# EAGLE board routev11.1 (EAGLE 8.6.0)
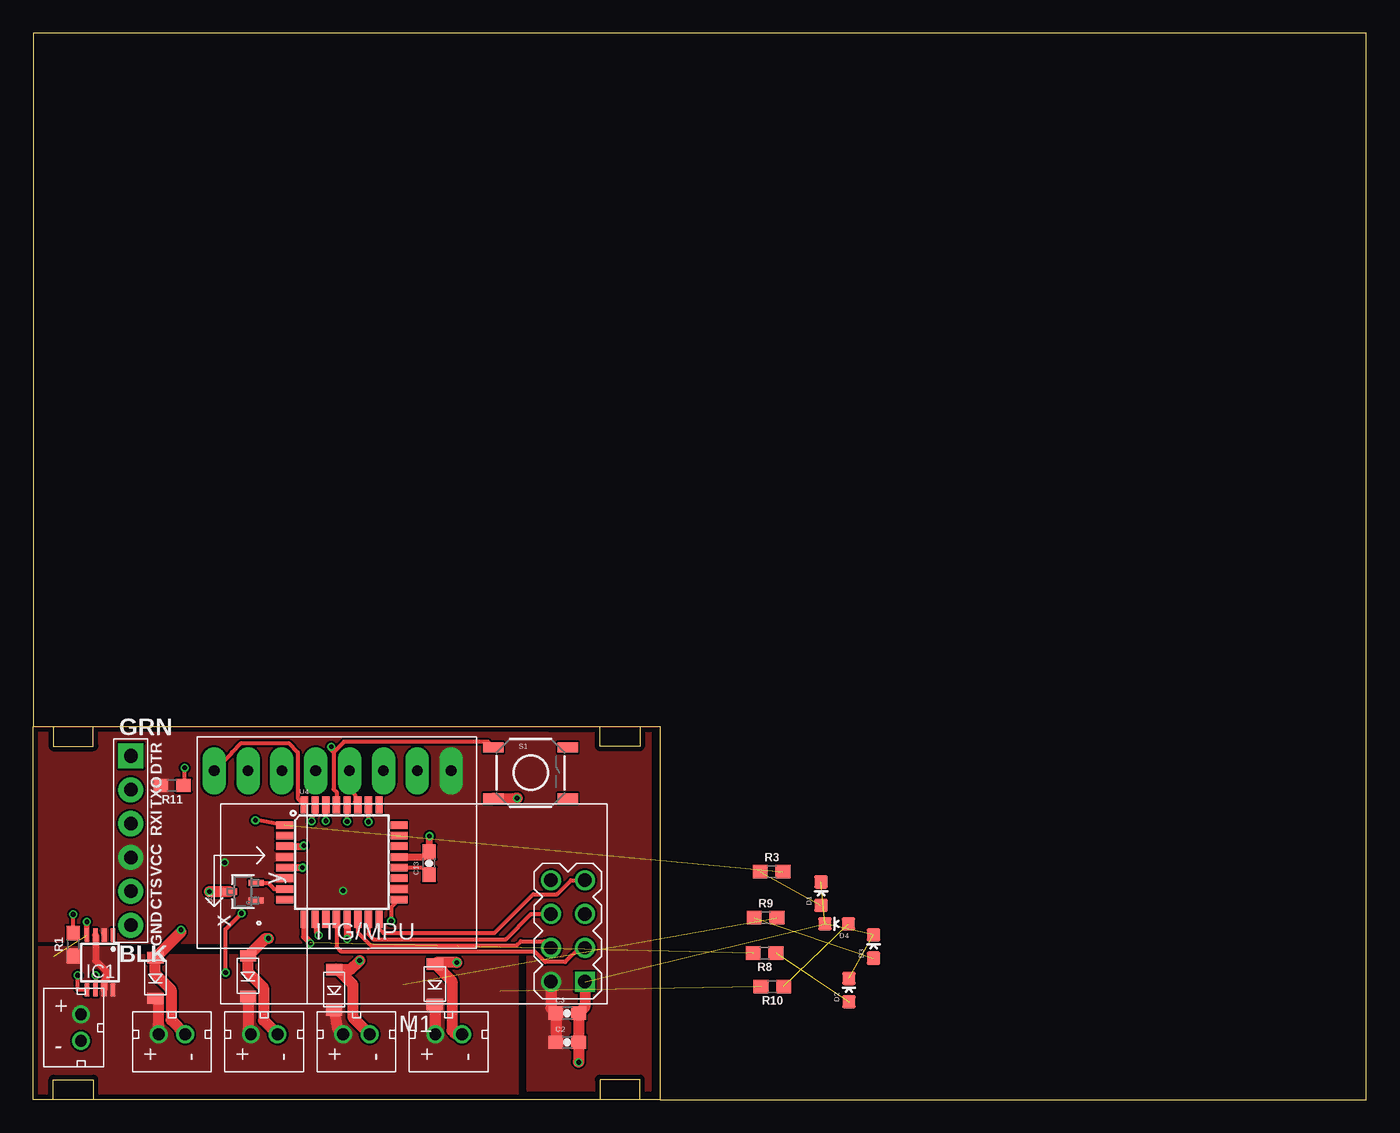
[diagram p0: board, top side]
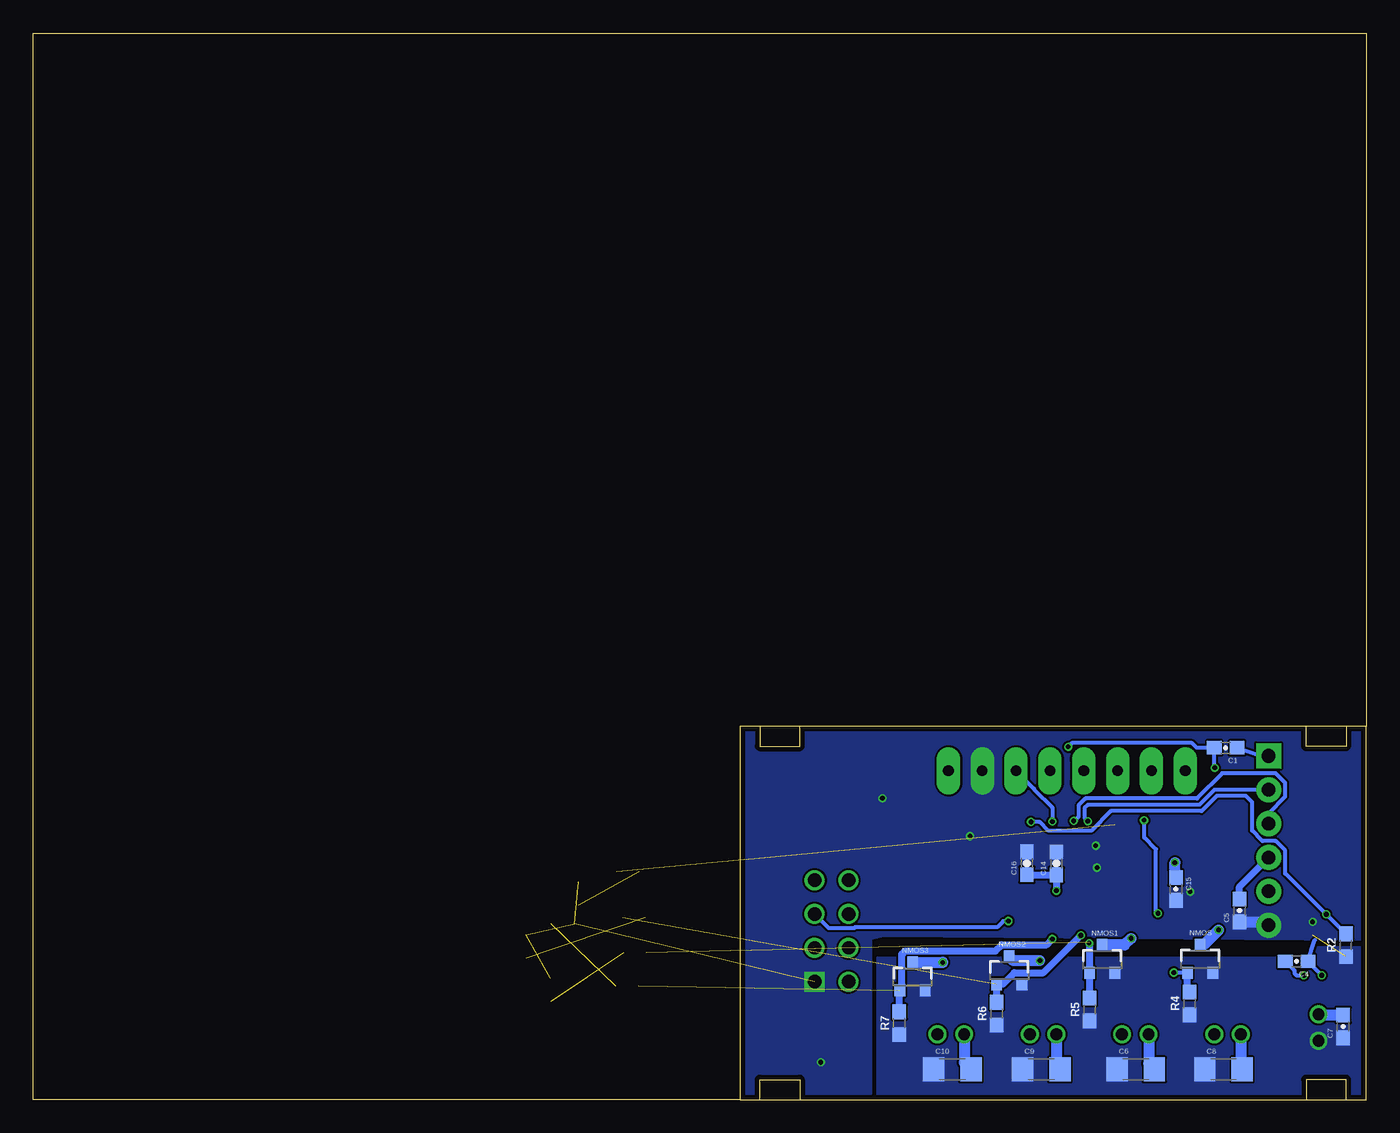
[diagram p1: board, bottom side, seen from below]

Size 100 x 80 mm. Coordinates in mm from the lower left corner, seen from the top.
Outline: 47,0 100,0 100,80 0,80 0,28
Outline: 0,28 0,0 1.5,0
Outline: 0,28 1.5,28
Outline: 1.5,28 4.5,28
Outline: 4.5,28 42.5,28
Outline: 42.5,28 45.5,28
Outline: 45.5,28 47,28 47,0
Outline: 47,0 45.5,0
Outline: 45.5,0 42.5,0
Outline: 42.5,0 4.5,0
Outline: 4.5,0 1.5,0
Outline: 1.5,0 1.5,1.5 4.5,1.5 4.5,0
Outline: 1.5,28 1.5,26.5 4.5,26.5 4.5,28
Outline: 45.5,28 45.5,26.5 42.5,26.5 42.5,28
Outline: 45.5,0 45.5,1.5 42.5,1.5 42.5,0
Copper layers (1*16): Top 0.035559375mm / dielectric 1.6mm / Bottom 0.035559375mm
Design rules "oshpark-2layer": minimum track width 6mil, minimum drill 10mil, track to track 6mil, track to pad 6mil, pad to pad 6mil, via to via 6mil, smd to smd 6mil, copper to edge 15mil, drill to drill 6mil, minimum pad ring 5mil, minimum via ring 5mil, stop-mask expansion 2.5mil, vias tented up to drill 0mil, thermal gap 10mil

## Footprints (pad centres in the part's own frame; a part is rotated, then mirrored left to right if it is on the bottom)
0603-CAP = smd 1.1 x 1: 1 -0.85,0; 2 0.85,0
1206 = smd 1.6 x 1.8: 1 -1.4,0; 2 1.4,0
LED-0603 = smd 1 x 1: A 0,-0.877; C 0,0.877
MINI2-F3-B = smd 1.22 x 0.85: NEG 0,1.55; POS 0,-1.5
MSOP8 = smd 0.35 x 1: 1 -0.975,-2.05; 2 -0.325,-2.05; 3 0.325,-2.05; 4 0.975,-2.05; 5 0.975,2.05; 6 0.325,2.05; 7 -0.325,2.05; 8 -0.975,2.05
FTDI_DEVICE_SIDE = drill 1.016 pad 1.88 square: P$1 -6.35,0 | drill 1.016 pad 1.88: P$2 -3.81,0; P$3 -1.27,0; P$4 1.27,0; P$5 3.81,0; P$6 6.35,0
WIRELESS-NRF24L01 = drill 1 square: 1 -12.7,6.35 | drill 1: 2 -10.16,6.35; 3 -12.7,3.81; 4 -10.16,3.81; 5 -12.7,1.27; 6 -10.16,1.27; 7 -12.7,-1.27; 8 -10.16,-1.27
JST_CONNECTOR_FEMALE = drill 0.889: + 0,1; - 0,-1
SOT23-3 = smd 0.8 x 0.9: 1 -0.95,-1; 2 0.95,-1; 3 0,1.1
0603 = smd 1.1 x 1: 1 -0.85,0; 2 0.85,0
TACTILE-SWITCH-SMD = smd 1.524 x 0.762: 1 -2.794,1.905; 2 2.794,1.905; 3 -2.794,-1.905; 4 2.794,-1.905
GY-521 = drill 0.8 pad 1.778 long: ADO -8.89,-6.35; GND -8.89,6.35; INT -8.89,-8.89; SCL -8.89,3.81; SDA -8.89,1.27; VCC -8.89,8.89; XCL -8.89,-3.81; XDA -8.89,-1.27
21-0075D = smd 0.457 x 1.118: 1 -0.65,-0.991; 2 0.65,-0.991; 3 0,0.991
TQFP32-08 = smd 1.27 x 0.559: 1 -4.293,2.8; 2 -4.293,2; 3 -4.293,1.2; 4 -4.293,0.4; 5 -4.293,-0.4; 6 -4.293,-1.2; 7 -4.293,-2; 8 -4.293,-2.8; 17 4.293,-2.8; 18 4.293,-2; 19 4.293,-1.2; 20 4.293,-0.4; 21 4.293,0.4; 22 4.293,1.2; 23 4.293,2; 24 4.293,2.8 | smd 0.559 x 1.27: 9 -2.8,-4.293; 10 -2,-4.293; 11 -1.2,-4.293; 12 -0.4,-4.293; 13 0.4,-4.293; 14 1.2,-4.293; 15 2,-4.293; 16 2.8,-4.293; 25 2.8,4.293; 26 2,4.293; 27 1.2,4.293; 28 0.4,4.293; 29 -0.4,4.293; 30 -1.2,4.293; 31 -2,4.293; 32 -2.8,4.293

## Placement (x,y rotation side)
C1  100nF  [0603-CAP]  10.54,26.39 180 bottom
C2  10uF  [0603-CAP]  40.06,4.29 0 top
C3  100nF  [0603-CAP]  40.06,6.48 0 top
C4  1uF  [0603-CAP]  5.22,10.37 180 bottom
C5  10uF  [0603-CAP]  9.5,14.18 90 bottom
C6  100uF  [1206]  17.29,2.26 0 bottom
C7  10uF  [0603-CAP]  1.73,5.49 90 bottom
C8  100uF  [1206]  10.71,2.26 0 bottom
C9  100uF  [1206]  24.37,2.26 0 bottom
C10  100uF  [1206]  31.05,2.26 0 bottom
C13  100nF  [0603-CAP]  29.69,17.73 90 top
C14  100nF  [0603-CAP]  23.24,17.7 90 bottom
C15  100nF  [0603-CAP]  14.27,15.8 270 bottom
C16  100nF  [0603-CAP]  25.45,17.73 90 bottom
D1  BLUE  [LED-0603]  59.11,15.44 0 top
D2  BLUE  [LED-0603]  61.19,8.2 0 top
D3  BLUE  [LED-0603]  63.04,11.48 0 top
D4  BLUE  [LED-0603]  60.27,13.18 90 top
DIODE  DB2W40300L  [MINI2-F3-B]  9.16,9.14 180 top
DIODE1  DB2W40300L  [MINI2-F3-B]  16.11,9.29 180 top
DIODE2  DB2W40300L  [MINI2-F3-B]  22.57,8.25 180 top
DIODE3  DB2W40300L  [MINI2-F3-B]  30.13,8.66 180 top
IC1  MCP1253-ADJ  [MSOP8]  4.99,10.29 180 top
J1  FTDI_DEVICE  [FTDI_DEVICE_SIDE]  7.32,19.43 270 top
M1  WIRELESS-NRF24L01  [WIRELESS-NRF24L01]  28.68,15.19 180 top
MOTOR1  JST_CONNECTOR_FEMALE  [JST_CONNECTOR_FEMALE]  10.4,4.9 90 top
MOTOR2  JST_CONNECTOR_FEMALE  [JST_CONNECTOR_FEMALE]  17.32,4.9 90 top
MOTOR3  JST_CONNECTOR_FEMALE  [JST_CONNECTOR_FEMALE]  24.24,4.9 90 top
MOTOR4  JST_CONNECTOR_FEMALE  [JST_CONNECTOR_FEMALE]  31.16,4.9 90 top
NMOS  N-CHANNEL-MOSFET-IRLML6244TRPBF  [SOT23-3]  12.46,10.52 0 bottom
NMOS1  N-CHANNEL-MOSFET-IRLML6244TRPBF  [SOT23-3]  19.81,10.49 0 bottom
NMOS2  N-CHANNEL-MOSFET-IRLML6244TRPBF  [SOT23-3]  26.78,9.66 0 bottom
NMOS3  N-CHANNEL-MOSFET-IRLML6244TRPBF  [SOT23-3]  34.03,9.2 0 bottom
R1  2.2k  [0603]  3,11.63 90 top
R2  2.2k  [0603]  1.52,11.58 90 bottom
R3  2.2k  [0603]  55.4,17.09 0 top
R4  10k  [0603]  13.25,7.2 90 bottom
R5  10k  [0603]  20.75,6.75 90 bottom
R6  10k  [0603]  27.72,6.45 90 bottom
R7  10k  [0603]  35.03,5.74 90 bottom
R8  2.2k  [0603]  54.86,11 180 top
R9  2.2k  [0603]  54.94,13.64 0 top
R10  2.2k  [0603]  55.45,8.48 180 top
R11  10k  [0603]  10.41,23.57 180 top
S1  SWITCH-MOMENTARY-2SMD  [TACTILE-SWITCH-SMD]  37.31,24.51 0 top
U2  GY-521MPU6050  [GY-521]  22.45,15.77 270 top
U3  MAX7375AXR805-T  [21-0075D]  15.72,15.6 90 top
U4  ATMEGA328P_TQFP  [TQFP32-08]  23.14,17.8 0 top
U$1  JST_CONNECTOR_FEMALE  [JST_CONNECTOR_FEMALE]  3.58,5.4 0 top

## Library data of the parts
C1 C4 C5 C7 C15 = SparkFun-Capacitors; PROD_ID: CAP-00810
C2 C3 C6 C8-C10 C13 C14 C16 = SparkFun-Passives
D1 = LEDs; PROD_ID: DIO-08575; SPICEPREFIX: D
D2-D4 = LEDs; PROD_ID: DIO-08575
DIODE DIODE1-DIODE3 J1 M1 MOTOR1-MOTOR4 U2 U$1 = quad
IC1 = microchip
NMOS NMOS1-NMOS3 = quad; DATASHEET: http://www.mouser.com/ds/2/196/irlml6244pbf-936666.pdf; MOUSER: 942-IRLML6244TRPBF; URL: http://www.mouser.com/Search/ProductDetail.aspx?R=IRLML6244TRPBFvirtualkey57370000virtualkey942-IRLML6244TRPBF
R1 R2 R4-R11 = SparkFun-Resistors; PROD_ID: RES-08272
R3 = SparkFun-Resistors; PROD_ID: RES-08272; SPICEPREFIX: R
S1 = quad; PROD_ID: SWCH-08247
U3 = MAX7375AXR805-T; AVAILABILITY: Good; DESCRIPTION: OSCILLATOR MEMS 8MHZ CMOS SMD; MF: Maxim Integrated; MP: MAX7375AXR805+T; PACKAGE: SC-70 Maxim Integrated; PRICE: 1.06 USD
U4 = quad; PROD_ID: IC-09069

## Nets
BATTERY+: C6.2 C7.2 C8.2 C9.2 C10.2 DIODE1.NEG DIODE2.NEG DIODE3.NEG DIODE.NEG IC1.3 IC1.7 IC1.8 MOTOR1.+ MOTOR2.+ MOTOR3.+ MOTOR4.+ R1.1 U$1.+
FTDI-RX: J1.P$3 U4.30
FTDI-TX: J1.P$2 U4.31
GND: C2.2 C3.2 C5.1 C6.1 C7.1 C8.1 C9.1 C10.1 C13.2 C14.2 C15.2 C16.2 D1.C D2.C D3.C D4.C IC1.4 J1.P$6 M1.1 NMOS1.2 NMOS2.2 NMOS3.2 NMOS.2 R2.1 R4.1 R5.1 R6.1 R7.1 S1.3 U2.GND U3.3 U4.3 U4.5 U4.21 U$1.-
IMU-INT: U2.INT U4.32
IMU-SCL: U2.SCL U4.28
IMU-SDA: U2.SDA U4.27
MEASURE_PIN: R1.2 R2.2 U4.26
MOTOR1: NMOS.1 R3.2 R4.2 U4.1
MOTOR2: NMOS1.1 R5.2 R8.2 U4.9
MOTOR3: NMOS2.1 R6.2 R9.2 U4.10
MOTOR4: NMOS3.1 R7.2 R10.2 U4.13
N$1: D4.A R10.1
N$2: C1.1 J1.P$1
N$3: D3.A R9.1
N$4: DIODE1.POS MOTOR2.- NMOS1.3
N$5: DIODE2.POS MOTOR3.- NMOS2.3
N$6: DIODE.POS MOTOR1.- NMOS.3
N$7: DIODE3.POS MOTOR4.- NMOS3.3
N$8: C4.1 IC1.5
N$9: C4.2 IC1.6
N$10: D2.A R8.1
N$11: D1.A R3.1
N$15: C13.1 U4.20
OSC1: U3.2 U4.7
RESET: C1.2 R11.1 S1.1 U4.29
RF-CE: M1.3 U4.12
RF-CSN: M1.4 U4.14
RF-MISO: M1.7 U4.16
RF-MOSI: M1.6 U4.15
RF-SCK: M1.5 U4.17
VCC: C2.1 C3.1 C5.2 C14.1 C15.1 C16.1 IC1.2 J1.P$4 M1.2 R11.2 U2.VCC U3.1 U4.4 U4.6 U4.18

## Tracks (layer width: path | path; a pad name or v marks a point on that pad's centre or on a via)
BATTERY+
  Top 0.508: IC1.3 4.67,10.44 5.46,9.65 5.46,9 5.32,8.86 IC1.7
  Top 0.813: DIODE1.NEG 16.11,5.11 MOTOR2.+ | DIODE2.NEG 22.8,5.34 MOTOR3.+ 23.24,4.67 | DIODE3.NEG 30.13,4.93 MOTOR4.+ | MOTOR1.+ 9.4,5.54 9.36,5.57 9.36,7.39 DIODE.NEG
  Bottom 0.813: MOTOR1.+ 9.4,2.35 C8.2 | MOTOR2.+ 16.32,2.69 C6.2 | MOTOR3.+ 23.24,2.53 C9.2 | MOTOR4.+ 30.16,2.77 C10.2 | C7.2 3.52,6.33 U$1.+
  pour Top (no thermals): 0.18,11.48 6.35,11.46 6.22,10.87 36.32,10.9 36.32,0.13 0.05,0.13
FTDI-RX  (via drill 0.35)
  Top 0.305: v21.95,20.9 U4.30
  Bottom 0.305: J1.P$3 7.32,21.48 6.07,22.73 6.07,23.76 6.8,24.49 10.79,24.49 12.7,22.58 21.07,22.58 21.59,22.06 21.59,21.21 21.95,20.85 v21.95,20.9
FTDI-TX  (via drill 0.35)
  Top 0.305: v20.88,20.88 20.88,21.11 21.16,21.39 21.14,21.4 U4.31
  Bottom 0.305: J1.P$2 11.39,23.24 12.51,22.12 20.88,22.12 21.13,21.87 21.13,21.13 v20.88,20.88
GND  (via drill 0.35)  (5 unrouted)
  Top 0.406: IC1.4 4.02,13.13 4.01,13.18 v4.01,13.34
  Top 0.508: v29.72,19.76 29.72,18.61 C13.2 29.32,18.2 U4.21 | U4.5 20.14,17.4 v20.19,17.4 | U4.3 20.15,19 20.19,19.05 v20.3,19.05
  Top 0.813: M1.1 41.38,6.95 C3.2 C2.2 40.91,2.86 40.89,2.85 40.89,2.82 v40.92,2.79 | S1.3 36.2,22.61 36.22,22.58 36.25,22.61 v36.3,22.61 | U3.3 13.26,15.6 v13.21,15.6
  Bottom 0.813: C5.1 7.32,13.33 J1.P$6
  pour Bottom (no thermals): 0.08,11.43 6.15,11.43 6.17,10.62 36.7,10.64 36.7,-0.3 -0.28,-0.3
  pour Bottom (no thermals): 0.25,27.84 46.74,28.12 46.74,0.41 37.13,0.41 37.13,12.04 36.22,12.27 0.15,11.99
IMU-INT
  Top 0.305: U2.INT 14.91,26.01 14.91,26.05 15.61,26.75 19.14,26.75 19.84,26.05 19.84,22.6 U4.32
IMU-SCL  (via drill 0.35)
  Top 0.305: v23.55,20.85 v23.54,20.86 U4.28
  Bottom 0.305: U2.SCL 24.92,23.32 24.92,23.28 23.55,21.91 v23.55,20.85 23.55,20.83
IMU-SDA
  Top 0.305: U4.27 24.13,22.31 24.13,22.86 23.72,23.26 U2.SDA
MEASURE_PIN  (via drill 0.35)
  Top 0.305: v25.15,20.83 U4.26 | R1.2 v3,13.89
  Bottom 0.305: v25.15,20.83 24.49,20.83 23.83,20.17 20.62,20.17 19.15,21.64 12.35,21.64 11.2,22.78 9.04,22.78 8.56,22.3 8.56,20.18 7.78,19.41 6.8,19.41 6.07,18.68 6.07,16.97 v3,13.89 2.98,13.89 R2.2
MOTOR1  (via drill 0.35)  (1 unrouted)
  Top 0.305: v14.43,9.53 14.43,12.78 v15.62,13.97 | v16.66,20.95 16.72,21.01 U4.1
  Bottom 0.305: NMOS.1 14.42,9.52 v14.43,9.53 | v15.62,13.97 15.77,14.12 15.77,18.77 16.66,19.66 v16.66,20.95
  Bottom 0.508: R4.2 13.41,8.21 NMOS.1
MOTOR2  (via drill 0.35)  (1 unrouted)
  Top 0.508: U4.9 20.34,12.22 20.78,11.79 v20.78,11.73
  Bottom 0.305: 20.75,9.48 NMOS1.1
  Bottom 0.508: R5.2 20.76,7.61 NMOS1.1 20.78,9.51 v20.78,11.73
MOTOR3  (via drill 0.35)  (1 unrouted)
  Top 0.305: U4.10 21.22,13.3 21.22,12.51 v21.41,12.32
  Bottom 0.508: v21.41,12.32 24.21,9.52 26.4,9.52 27.25,8.66 NMOS2.1 R6.2
MOTOR4  (via drill 0.35)  (1 unrouted)
  Top 0.508: U4.13 v23.54,12.04 v23.55,12.04
  Bottom 0.508: R7.2 35.03,8.15 NMOS3.1 34.84,8.34 34.84,10.91 34.6,11.15 27.81,11.15 27.35,11.62 23.97,11.62 v23.55,12.04
N$1  (1 unrouted)
N$2
  Bottom 0.305: J1.P$1 7.99,25.78 C1.1
N$3  (1 unrouted)
N$4  (via drill 0.35)
  Top 0.813: MOTOR2.- 17.28,5.94 17.28,8.39 16.11,9.56 DIODE1.POS 17.42,12.09 v17.63,12.09
  Bottom 0.813: v17.63,12.09 18.13,11.59 NMOS1.3
N$5  (via drill 0.35)
  Top 0.813: MOTOR3.- 23.97,6.17 23.97,8.63 22.8,9.8 DIODE2.POS 23.8,9.75 v24.49,10.41
  Bottom 0.813: v24.49,10.41 26.46,10.41 NMOS2.3
N$6  (via drill 0.35)
  Top 0.305: 11.07,12.56 v11.07,12.72
  Top 0.813: MOTOR1.- 10.33,5.97 10.33,8.25 9.16,9.42 DIODE.POS 11.07,12.56
  Bottom 0.305: 12.18,11.62 NMOS.3
  Bottom 0.813: v11.07,12.72 12.18,11.62
N$7  (via drill 0.35)
  Top 0.813: MOTOR4.- 31.7,4.9 31.42,5.18 31.42,8.88 DIODE3.POS 30.26,10.29 v31.77,10.29
  Bottom 0.813: NMOS3.3 v31.79,10.3 v31.77,10.29
N$8  (via drill 0.35)
  Top 0.305: IC1.5 3.33,8.24 v3.33,9.32 3.33,9.35
  Bottom 0.305: 3.84,11.96 C4.1 v3.33,9.32
N$9  (via drill 0.35)
  Top 0.305: v4.67,9.32 IC1.6
  Bottom 0.305: C4.2 5.38,9.68 5.38,9.47 5.23,9.32 v4.67,9.32
N$10  (1 unrouted)
N$11  (1 unrouted)
N$15
  Top 0.305: U4.20 29.17,17.4 C13.1
OSC1
  Top 0.305: U3.2 17.61,16.25 18.06,15.8 U4.7
RESET  (via drill 0.35)
  Top 0.305: S1.1 34.1,26.83 23.32,26.83 22.53,26.05 | 22.53,26.05 22.53,23.28 22.74,23.07 U4.29 | R11.1 arc90 11.35,23.66 v11.35,24.89 | v22.35,26.47 22.35,26.23 22.53,26.05
  Bottom 0.305: v11.35,24.89 arc90 11.39,24.93 C1.2 12.71,26.39 13.07,26.75 22.07,26.75 v22.35,26.47
RF-CE
  Top 0.305: U4.12 22.74,11.45 23.06,11.12 25.13,11.12 37.6,11.12 38.4,10.32 39.91,10.32 40.97,11.38 M1.3
RF-CSN
  Top 0.305: U4.14 24.34,12.56 25.32,11.58 36.27,11.58 36.58,11.89 38.33,11.89 M1.4
RF-MISO
  Top 0.305: U4.16 25.94,12.82 26.27,12.49 34.59,12.49 35.53,13.44 | 35.53,13.44 35.61,13.51 | 35.53,13.44 37.5,15.4 39.27,15.4 40.33,16.46 M1.7
RF-MOSI
  Top 0.305: U4.15 25.14,12.4 25.51,12.04 35.46,12.04 37.34,13.92 M1.6
RF-SCK  (via drill 0.35)
  Top 0.305: U4.17 26.85,14.41 v26.85,13.39
  Bottom 0.305: v26.85,13.39 27.23,13.39 27.69,12.93 38.33,12.93 38.4,12.86 40.32,12.86 M1.5
VCC  (via drill 0.35)
  Top 0.813: M1.2 38.84,6.85 C3.1 C2.1
  Bottom 0.508: C16.1 25.43,16.85 C14.1 v23.24,15.67 | C5.2 9.5,15.97 J1.P$4
  Bottom 0.813: C15.1 14.33,16.7 v14.35,17.78
  pour Top (no thermals): -0.03,27.71 -0.08,11.91 8.48,11.73 37.03,11.86 37.06,0.71 46.35,0.71 46.35,27.48